# Altium PCB teplomer-tmp.PCBDOC
Units mil, origin at the board's own origin, x right, y up, seen from the top; angles counter-clockwise.
Board outline 6000 x 4000 mil, 2 copper layers (Top Layer, Bottom Layer); 38 components, 14 nets, 114 pads, 0 vias.
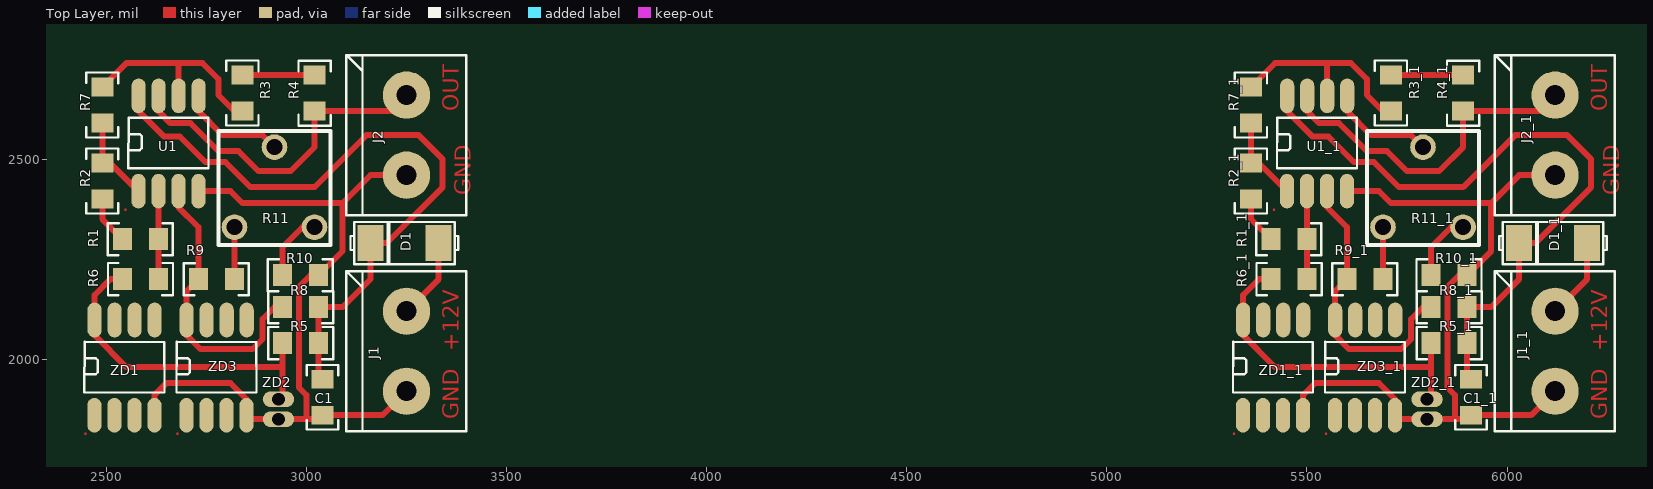
[diagram p0: Top Layer view]
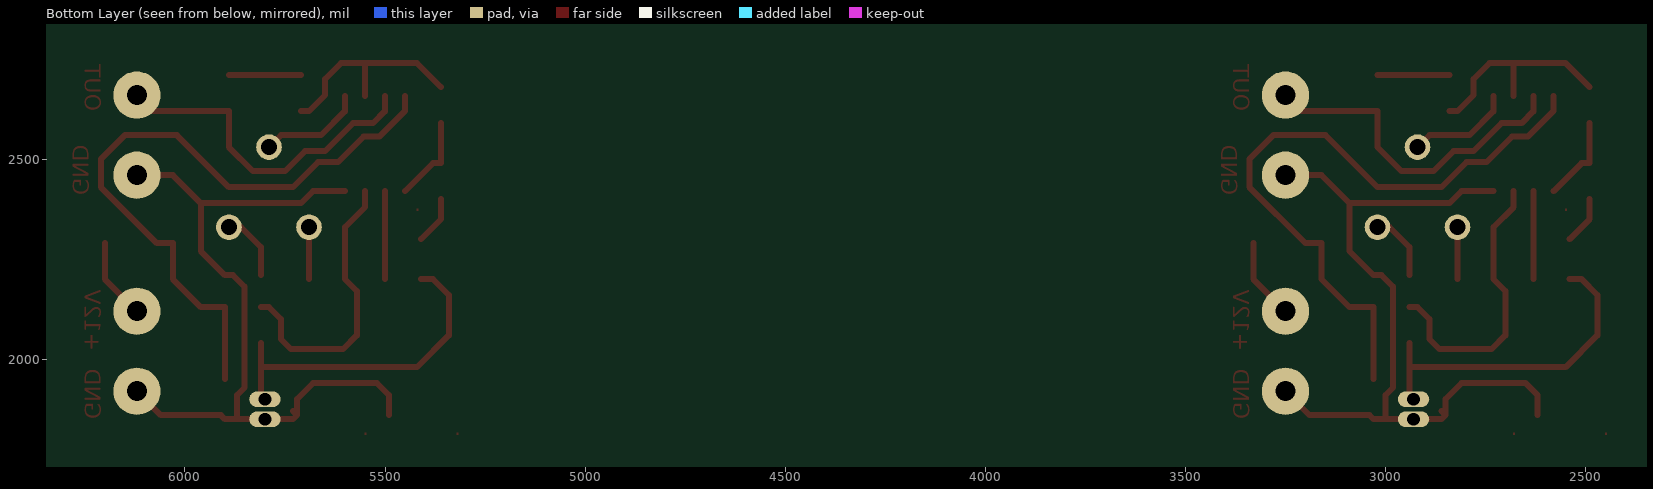
[diagram p1: Bottom Layer view, seen from below]

## Layer stack, top to bottom
Top Layer: signal copper 1.4
Dielectric: dielectric 12.6, FR-4, Dk 4.8
Bottom Layer: signal copper 1.4

## Board outline
1000,1000 7000,1000 7000,5000 1000,5000

## Design rules (kind name [scope] priority, off if disabled: settings)
Clearance [All] p1: gap=10
ComponentClearance [All] p1 off: gap=0 collisioncheckmode=0 verticalgap=10
PolygonConnect [All] p1: connectstyle=Relief reliefconductorwidth=10 reliefentries=4 polygonreliefangle="90 Angle"
RoutingVias [All] p1: holewidth=28 width=50 viastyle="Through Hole" minholewidth=28 minwidth=50 maxholewidth=28 maxwidth=50
SolderMaskExpansion [All] p1: expansion=4
TestPointUsage [All] p1: valid=0 allowmultiple=FALSE
Testpoint [All] p1: side=15 testpointundercomponent=TRUE minsize=40 maxsize=100 preferedsize=60 minholesize=0 maxholesize=40 preferedholesize=32 testpointgrid=1 style=1023 order=0-112345678
Width [All] p1: maxlimit=50 minlimit=10 preferedwidth=10 toplayer_prefwidth=15 minimp=50.000000 maximp=50.000000 favimp=50.000000
17 further rules are at their usual default settings.

## Classes and differential pairs
component class teplomer: C1 D1 J1 J2 R1 R2 R3 R4 R5 R6 R7 R8 R9 R10 R11 U1 ZD1 ZD3

## Components (designator, comment, footprint, x,y, rotation, side; value= is the part's Value field where it differs from the comment)
C1 "C" C0805 3040,1860 r90 top
C1_1 "C" C0805 5910,1860 r90 top (schematic designator C1)
D1 "D" SMA 3280,2290 r180 top
D1_1 "D" SMA 6150,2290 r180 top (schematic designator D1)
J1 "CON_2" ARK_2 3250,2120 r270 top
J1_1 "CON_2" ARK_2 6120,2120 r270 top (schematic designator J1)
J2 "CON_2" ARK_2 3250,2660 r270 top
J2_1 "CON_2" ARK_2 6120,2660 r270 top (schematic designator J2)
R1 "10k" R0805 2540,2300 r0 top
R1_1 "10k" R0805 5410,2300 r0 top (schematic designator R1)
R2 "10k" R0805 2490,2490 r270 top
R2_1 "10k" R0805 5360,2490 r270 top (schematic designator R2)
R3 "27k" R0805 2840,2710 r270 top
R3_1 "27k" R0805 5710,2710 r270 top (schematic designator R3)
R4 "33k" R0805 3020,2620 r90 top
R4_1 "33k" R0805 5890,2620 r90 top (schematic designator R4)
R5 "10k" R0805 3030,2040 r180 top
R5_1 "10k" R0805 5900,2040 r180 top (schematic designator R5)
R6 "10k" R0805 2630,2200 r180 top
R6_1 "10k" R0805 5500,2200 r180 top (schematic designator R6)
R7 "12k" R0805 2490,2680 r270 top
R7_1 "12k" R0805 5360,2680 r270 top (schematic designator R7)
R8 "10k" R0805 3030,2130 r180 top
R8_1 "10k" R0805 5900,2130 r180 top (schematic designator R8)
R9 "25k" R0805 2730,2200 r0 top
R9_1 "25k" R0805 5600,2200 r0 top (schematic designator R9)
R10 "27k" R0805 2940,2210 r0 top
R10_1 "27k" R0805 5810,2210 r0 top (schematic designator R10)
R11 "4k7" "Trimr PT655" 3020,2330 r180 top
R11_1 "4k7" "Trimr PT655" 5890,2330 r180 top (schematic designator R11)
U1 "MC1458D" SO8 2580,2420 r90 top
U1_1 "MC1458D" SO8 5450,2420 r90 top (schematic designator U1)
ZD1 "LM135" SO8 2470,1860 r90 top
ZD1_1 "LM135" SO8 5340,1860 r90 top (schematic designator ZD1)
ZD2 "LM135" TO-92 2930,1900 r0 top
ZD2_1 "LM135" TO-92 5800,1900 r0 top (schematic designator ZD2)
ZD3 "LM136" SO8 2700,1860 r90 top
ZD3_1 "LM136" SO8 5570,1860 r90 top (schematic designator ZD3)

## Footprints (in the part's own frame and the unit in brackets; to place one, negate y for a bottom-side part, rotate by r counter-clockwise, add the part's x,y. Pads: shape width x height; smd on the part's side, far side on the other; paste and mask are expansions set on the pad)
ARK_2 [mm]
  round 3 hole 1.27: 1(0,0) 2(5.08,0)
  silkscreen extent -2.54,-3.82 7.62,3.8
C0805 [mm]
  rect 1.2x1.4 smd: 1(0,0) 2(2.286,0)
  silkscreen extent -0.9,-1 3.19,1
R0805 [mm]
  rect 1.2x1.4 smd: 1(0,0) 2(2.286,0)
  silkscreen extent -0.93,-1.03 3.2,1.02
SMA [mil]
  rect 65x90 smd: 1(-50,0) 2(120,0)
  silkscreen extent -99,-53 170,53
SO8 [mm]
  oval 2.2x0.9 smd: 1(0,0) 2(0,-1.27) 3(0,-2.54) 4(0,-3.81) 5(6.045,-3.823) 6(6.045,-2.553) 7(6.045,-1.283) 8(6.045,-0.013)
  silkscreen extent 1.45,-4.44 4.66,0.64
TO-92 [mm]
  oval 2x1 hole 0.8: 2(0,0) 3(0,-1.27)
"Trimr PT655" [mil] "Resistor variable"
  round 64 hole 40: 1(0,0) 2(200,0) 3(100,-200)
  silkscreen extent -40,-240 240,45

## Part data
R1 R1_1 R2 R2_1 R3 R3_1 R4 R4_1 R5 R5_1 R6 R6_1 R7 R7_1 R8 R8_1 R9 R9_1 R10 R10_1: library part R
R11 R11_1: library part Trimr
U1 U1_1: "Dual Operational Amplifier"
ZD3 ZD3_1: library part LM135

## Nets (pads, with @x,y where several pads share a name; then routed paths per layer and width w, separated by ;. In a path a pad name is that pad's centre, name@x,y a point inside that pad or via, vN(x,y) a via of type N, cw(c..) or ccw(c..) an arc to the next point about the centre after c; other vN are vias at no path point)
GND: C1.1 J1.2 J2.2 R10.2 U1.4 ZD1.4 ZD2.3 ZD3.4 | length 1962.3
  Top Layer w15: ZD1.4 2620,1910 2650,1940 2810,1940 2850,1900 ZD3.4 ; U1.4 2810,2420 2840,2390 3090,2390 ; ZD3.4@2860,1870 ZD3.4 ; 3000,1850 3000,1910 2981.12,1928.88 2981.12,2181.12 3010,2210 R10.2 3090,2270 3090,2390 ; J1.2 3190,1860 C1.1 3030,1850 2860,1850 ZD3.4 ; J2.2 3160,2460 3090,2390
NetD1_1: D1.1 J1.1 | length 203.1
  Top Layer w15: J1.1 3330,2200 D1.1
NetJ2_1: J2.1 R4.1 U1.7 | length 851.3
  Top Layer w15: U1.7 2630.5,2619.5 2660,2590 2710,2590 2780,2520 2830,2520 2880,2470 2960,2470 3020,2530 R4.1 3210,2620 J2.1
NetR1_1: R1.1 R2.2 | length 120.7
  Top Layer w15: R2.2 2490,2350 R1.1
NetR1_2: R1.2 R6.1 U1.2 | length 220
  Top Layer w15: R6.1 U1.2
NetR2_1: R2.1 R7.2 U1.1 | length 219
  Top Layer w15: R7.2 R2.1 2510,2490 U1.1
NetR3_1: R3.1 R4.2 | length 180
  Top Layer w15: R3.1 R4.2
NetR3_2: R3.2 R7.1 U1.6 | length 530.2
  Top Layer w15: R7.1 2550,2740 2740,2740 2780,2700 2780,2660 2820,2620 R3.2 ; 2680,2740 2680.5,2739.5 U1.6
NetR5_2: R5.2 R6.2 ZD1.8 ZD2.2 | length 809.3
  Top Layer w15: R6.2 2510,2200 2470.5,2160.5 2470.5,2059.5 2550,1980 2940,1980 ; 2940,1920 R5.2
NetR8_2: R8.2 R9.1 U1.3 ZD3.8 | length 720
  Top Layer w15: U1.3 2680,2380 2730,2330 R9.1 2700.5,2170.5 2700.5,2059.5 2735,2025 2865,2025 2890,2050 2890,2100 2920,2130 R8.2
NetR9_2: R9.2 R11.2 | length 130
  Top Layer w15: R9.2 R11.2
NetR10_1: R10.1 R11.1 | length 170.7
  Top Layer w15: R10.1 2940,2280 2990,2330 R11.1
NetR11_3: R11.3 U1.5 | length 265.1
  Top Layer w15: U1.5 2730.5,2619.5 2790,2560 2890,2560 R11.3
VS: C1.2 D1.2 R5.1 R8.1 U1.8 | length 1691.9
  Top Layer w15: U1.8 2580.5,2620 2644.36,2556.14 2683.86,2556.14 2747.55,2492.45 2797.55,2492.45 2860,2430 3020,2430 3150,2560 3280,2560 3340,2500 3340,2430 3200,2290 D1.2 3160,2200 3090,2130 R8.1 R5.1 C1.2@3030,1950
pads on no net: C1_1.1 C1_1.2 D1_1.1 D1_1.2 J1_1.1 J1_1.2 J2_1.1 J2_1.2 R1_1.1 R1_1.2 R2_1.1 R2_1.2 R3_1.1 R3_1.2 R4_1.1 R4_1.2 R5_1.1 R5_1.2 R6_1.1 R6_1.2 R7_1.1 R7_1.2 R8_1.1 R8_1.2 R9_1.1 R9_1.2 R10_1.1 R10_1.2 R11_1.1 R11_1.2 R11_1.3 U1_1.1 U1_1.2 U1_1.3 U1_1.4 U1_1.5 U1_1.6 U1_1.7 U1_1.8 ZD1.1 ZD1.2 ZD1.3 ZD1.5 ZD1.6 ZD1.7 ZD1_1.1 ZD1_1.2 ZD1_1.3 ZD1_1.4 ZD1_1.5 ZD1_1.6 ZD1_1.7 ZD1_1.8 ZD2_1.2 ZD2_1.3 ZD3.1 ZD3.2 ZD3.3 ZD3.5 ZD3.6 ZD3.7 ZD3_1.1 ZD3_1.2 ZD3_1.3 ZD3_1.4 ZD3_1.5 ZD3_1.6 ZD3_1.7 ZD3_1.8
copper on no net: | length 8073.7
  Top Layer w15: 5360,2400 5360,2350 5410,2300 ; 5360,2590 5360,2490 5380,2490 5450,2420 ; 5360,2680 5420,2740 5610,2740 5650,2700 5650,2660 5690,2620 5710,2620 ; 5410,2200 5380,2200 5340.5,2160.5 5340.5,2059.5 5420,1980 5810,1980 ; 5450.5,2658 5450.5,2620 5514.36,2556.14 5553.86,2556.14 5617.55,2492.45 5667.55,2492.45 5730,2430 5890,2430 6020,2560 6150,2560 6210,2500 6210,2430 6070,2290 6030,2290 6030,2200 5960,2130 5900,2130 5900,2040 5900,1950 ; 5490,1860 5490,1910 5520,1940 5680,1940 5720,1900 5720,1860 ; 5500,2200 5500,2420 ; 5500.5,2658 5500.5,2619.5 5530,2590 5580,2590 5650,2520 5700,2520 5750,2470 5830,2470 5890,2530 5890,2620 6080,2620 6120,2660 ; 5550,2420 5550,2380 5600,2330 5600,2200 5570.5,2170.5 5570.5,2059.5 5605,2025 5735,2025 5760,2050 5760,2100 5790,2130 5810,2130 ; 5550,2740 5550.5,2739.5 5550.5,2658 ; 5600,2420 5680,2420 5710,2390 5960,2390 ; 5600.5,2658 5600.5,2619.5 5660,2560 5760,2560 5790,2530 ; 5690,2200 5690,2330 ; 5710,2710 5890,2710 ; 5730,1870 5720,1860 ; 5810,1920 5810,2040 ; 5810,2210 5810,2280 5860,2330 5890,2330 ; 5870,1850 5870,1910 5851.12,1928.88 5851.12,2181.12 5880,2210 5900,2210 5960,2270 5960,2390 ; 6120,1920 6060,1860 5910,1860 5900,1850 5730,1850 5720,1860 ; 6120,2120 6200,2200 6200,2290 ; 6120,2460 6030,2460 5960,2390

## Other copper
Top Layer:
  text "OUT" at 3380,2620 h40 r90
  text "OUT" at 6250,2620 h40 r90
  text "GND" at 3410,2410 h40 r90
  text "GND" at 6280,2410 h40 r90
  text "." at 2540,2370 h40
  text "." at 5410,2370 h40
  text "+12V" at 3380,2020 h40 r90
  text "+12V" at 6250,2020 h40 r90
  text "GND" at 3380,1850 h40 r90
  text "GND" at 6250,1850 h40 r90
  text "." at 2440,1810 h40
  text "." at 2670,1810 h40
  text "." at 5310,1810 h40
  text "." at 5540,1810 h40

## Silkscreen, mask and mechanical layers (free items; w line width, h text height)
Mechanical 1:
  lines w5: 2420,1790 3420,1790 3420,2790 2420,2790 2420,1790 ; 5290,1790 5290,2790 6290,2790 6290,1790 5290,1790